# EAGLE board GrooveStrip (EAGLE 9.6.0)
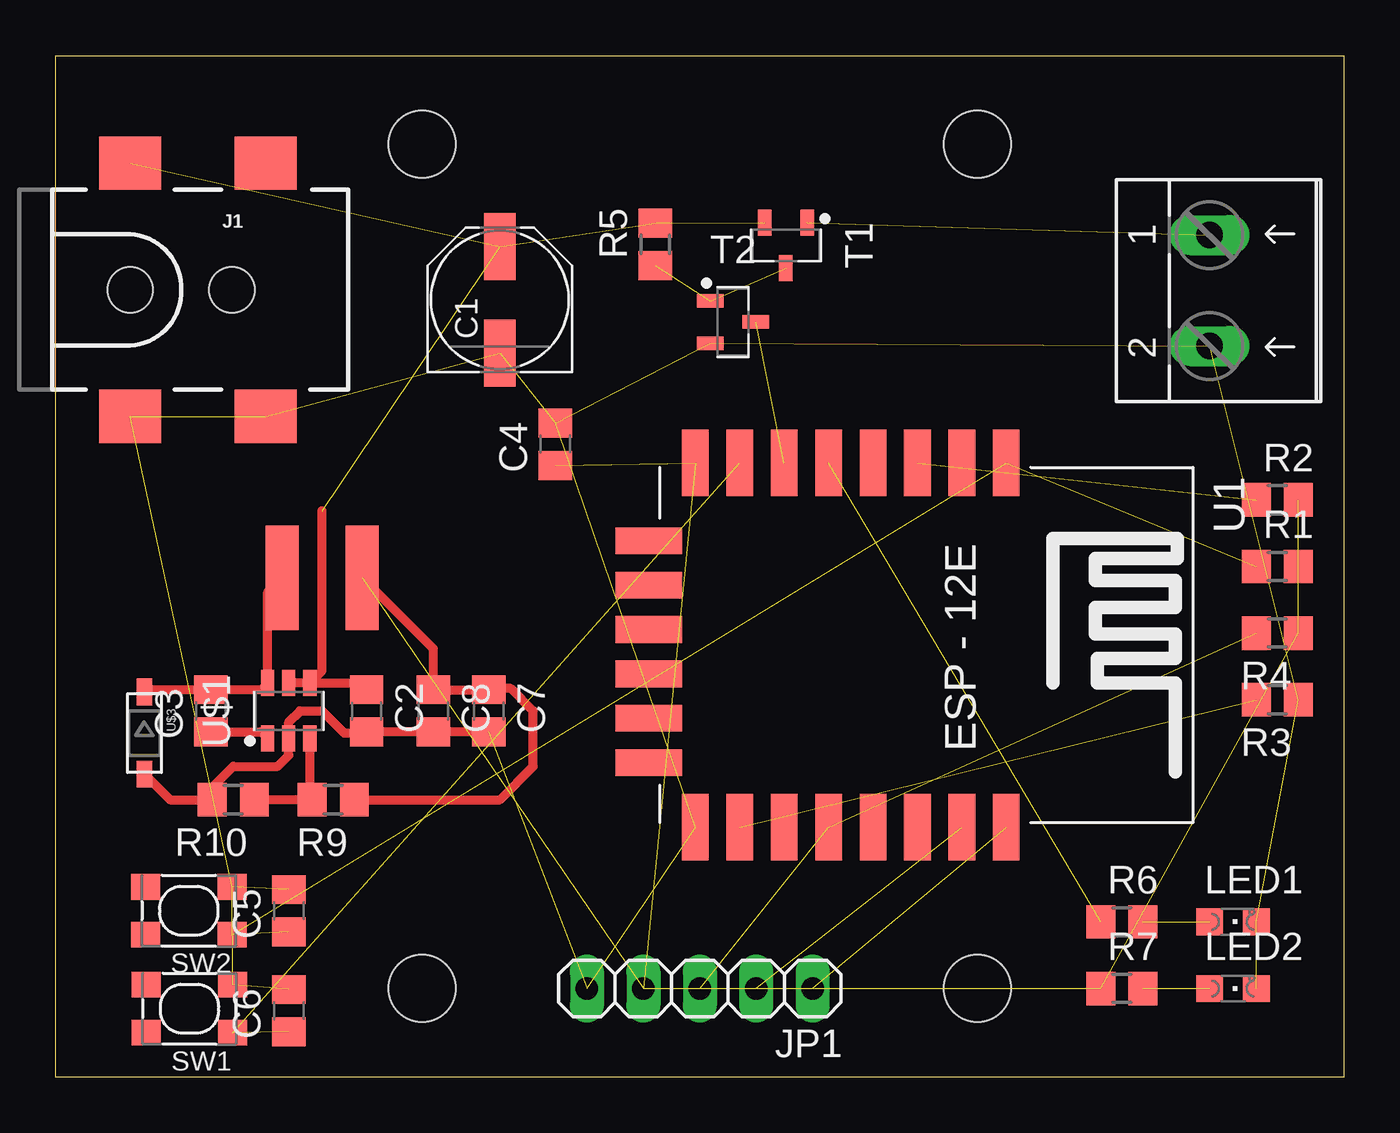
[diagram p0: board, top side]

Size 58 x 46 mm. Coordinates in mm from the lower left corner, seen from the top.
Outline: 0,0 0,46 58,46 58,0 0,0
Copper layers (1*16): Top 0.035mm / dielectric 1.5mm / Bottom 0.035mm
Design rules "default": minimum track width 6mil, minimum drill 0.35mm, track to track 6mil, track to pad 6mil, pad to pad 6mil, via to via 6mil, smd to smd 6mil, copper to edge 40mil, drill to drill 6mil, minimum pad ring 10mil, minimum via ring 8mil, stop-mask expansion 4mil, vias tented up to drill 0mil, thermal gap 10mil
Holes 3 mm at 16.5,4 41.5,4 16.5,42 41.5,42

## Footprints (pad centres in the part's own frame; a part is rotated, then mirrored left to right if it is on the bottom)
PANASONIC_D = smd 3 x 1.4: + 2.4,0; - -2.4,0
C0805 = smd 1.3 x 1.5: 1 -0.95,0; 2 0.95,0
POWER_JACK_SMD = smd 2.8 x 2.4: GND 0,-5.7; P$4 6.1,-5.7; VIN0 0,5.7; VIN1 6.1,5.7 | hole 2.032: 0,0; 4.572,0
1X05 = drill 1.016 long: 1 -5.08,0; 2 -2.54,0; 3 0,0; 4 2.54,0; 5 5.08,0
CHIPLED_0805 = smd 1.2 x 1.2: A 0,-1.05; C 0,1.05
R0805 = smd 1.3 x 1.5: 1 -0.95,0; 2 0.95,0
SW4-SMD-4.2X3.2X2.5MM = smd 1.3 x 1.15: 1 -1.95,1.075; 2 1.95,1.075; 3 -1.95,-1.075; 4 1.95,-1.075
SOT23-3 = smd 1.18 x 0.609: 1 -1.024,0.95; 2 -1.024,-0.95; 3 1.024,0
ESP12E-SMD = smd 3 x 1.2: ADC -8.3,3.8; CH_PD -8.3,1.8; GND 8.1,-8.2; GPIO0 8.1,-2.2; GPIO2 8.1,-4.2; GPIO4 8.1,-0.2; GPIO5 8.1,1.8; GPIO12 -8.3,-4.2; GPIO13 -8.3,-6.2; GPIO14 -8.3,-2.2; GPIO15 8.1,-6.2; GPIO16 -8.3,-0.2; RESET -8.3,5.8; RXD0 8.1,3.8; TXD0 8.1,5.8; VCC -8.3,-8.2 | smd 1.2 x 3: CS0 -4.8,-10.3; GPIO9 -0.8,-10.3; GPIO10 1.2,-10.3; MISO -2.8,-10.3; MOSI 3.2,-10.3; SCLK 5.2,-10.3
SOT23-6 = smd 1.171 x 0.589: 1 -1.25,0.95; 2 -1.25,0; 3 -1.25,-0.95; 4 1.25,-0.95; 5 1.25,0; 6 1.25,0.95
SRN5020 = smd 1.5 x 4.7: P$1 -1.8,0; P$2 1.8,0
SOD-123 = smd 1.2 x 0.7: A 1.85,0; C -1.85,0
SCREW_2P = drill 1.194 long: 1 -2.5,-1.27; 2 2.5,-1.27

## Placement (x,y rotation side)
C1  150u  [PANASONIC_D]  20,35 90 top
C2  10u  [C0805]  14,16.5 270 top
C3  10n  [C0805]  7,16.5 90 top
C4  100n  [C0805]  22.5,28.5 90 top
C5  100n  [C0805]  10.5,7.5 90 top
C6  100n  [C0805]  10.5,3 90 top
C7  10u  [C0805]  19.5,16.5 270 top
C8  10u  [C0805]  17,16.5 270 top
J1  5.5x2.1mm Barrel  [POWER_JACK_SMD]  3.36,35.45 0 top
JP1  [1X05]  29,4 180 top
LED1  [CHIPLED_0805]  53,7 270 top
LED2  [CHIPLED_0805]  53,4 270 top
R1  10k  [R0805]  55,23 0 top
R2  10k  [R0805]  55,26 0 top
R3  10k  [R0805]  55,17 180 top
R4  10k  [R0805]  55,20 180 top
R5  10k  [R0805]  27,37.5 90 top
R6  1k  [R0805]  48,7 0 top
R7  1k  [R0805]  48,4 0 top
R9  1k  [R0805]  12.5,12.5 180 top
R10  1k  [R0805]  8,12.5 180 top
SW1  DHT-4235A  [SW4-SMD-4.2X3.2X2.5MM]  6.03,3.09 180 top
SW2  DHT-4235A  [SW4-SMD-4.2X3.2X2.5MM]  6,7.5 180 top
T1  [SOT23-3]  32.88,37.45 270 top
T2  [SOT23-3]  30.5,34 0 top
U1  [ESP12E-SMD]  37,19.36 270 top
U$1  AP3211  [SOT23-6]  10.5,16.5 90 top
U$2  4u7  [SRN5020]  12,22.5 0 top
U$3  DIODE_SOD123  [SOD-123]  4,15.5 270 top
X1  [SCREW_2P]  53.22,35.42 270 top

## Library data of the parts
C1-C8 = rcl; SPICEPREFIX: C
J1 = philmalessa; PROD_ID: CONN-08106; SF_ID: PRT-12748
JP1 = pinhead
LED1 LED2 = led
R1-R7 R9 R10 = rcl; SPICEPREFIX: R
SW1 SW2 = philmalessa; MPN: DHT-4235A
T1 T2 U1 U$1-U$3 = philmalessa
X1 = philmalessa; MPN: 237-102; OC_FARNELL: unknown; OC_NEWARK: 70K9898

## Nets
!RESET: C5.1 R1.1 SW2.1 U1.RESET
+3V3: C4.1 C7.1 C8.1 JP1.4 R1.2 R2.2 R4.1 R7.1 R9.1 U1.VCC U$2.P$2
+12V: C1.+ C2.1 J1.VIN0 R5.2 T1.2 U$1.4 U$1.5
BUT1: C6.1 SW1.1 U1.GPIO13
GND: C1.- C2.2 C4.2 C5.2 C6.2 C7.2 C8.2 J1.GND J1.P$4 JP1.5 LED1.C LED2.C R3.1 R10.2 SW1.3 SW2.3 T2.2 U1.GND U$1.2 U$3.A X1.2
GPIO0: JP1.3 R4.2 U1.GPIO0
LED1: R6.1 U1.GPIO14
N$1: T1.1 X1.1
N$2: R2.1 U1.CH_PD
N$3: R9.2 R10.1 U$1.3
N$4: R3.2 U1.GPIO15
N$5: R5.1 T1.3 T2.1
N$6: LED1.A R6.2
N$7: LED2.A R7.2
N$10: C3.2 U$1.6 U$2.P$1 U$3.C
N$11: C3.1 U$1.1
PWM: T2.3 U1.GPIO12
RXD: JP1.2 U1.RXD0
TXD: JP1.1 U1.TXD0

## Tracks (layer width: path | path; a pad name or v marks a point on that pad's centre or on a via)
!RESET  (3 unrouted)
+3V3  (7 unrouted)
  Top 0.406: U$2.P$2 17,19.3 C8.1 C7.1 19.55,17.5 20.5,17.5 21.5,16.5 21.5,14 20,12.5 R9.1
+12V  (4 unrouted)
  Top 0.406: U$1.4 13.7,17.75 C2.1 | U$1.4 U$1.5 | U$1.4 12,18.3 12,25.5
BUT1  (2 unrouted)
GND  (15 unrouted)
  Top 0.406: U$3.A 5.15,12.5 R10.2 7.05,13.05 8,14 10,14 10.5,14.5 U$1.2 10.5,16 11,16.5 12,16.5 13,15.5 13.95,15.5 C2.2 C8.2 C7.2
GPIO0  (2 unrouted)
LED1  (1 unrouted)
N$1  (1 unrouted)
N$2  (1 unrouted)
N$3
  Top 0.406: R10.1 R9.2 11.45,12.6 U$1.3
N$4  (1 unrouted)
N$5  (2 unrouted)
N$6  (1 unrouted)
N$7  (1 unrouted)
N$10
  Top 0.406: U$2.P$1 9.55,21.85 U$1.6 9.25,17.45 C3.2 4.1,17.45 U$3.C
N$11
  Top 0.406: C3.1 9.25,15.55 U$1.1
PWM  (1 unrouted)
RXD  (1 unrouted)
TXD  (1 unrouted)